# Altium PCB PCB2.PcbDoc (part 1 of 2)
Units mil, origin at the board's own origin, x right, y up, seen from the top; angles counter-clockwise.
Board outline 322 x 552 mil, 6 copper layers (Top Layer, Layer 2, Layer 3, Layer 4, Layer 5, Bottom Layer), stack 16.56 mil thick; 59 components, 50 nets, 249 pads, 145 vias.
Unrouted connection lines stored in the file: 1.
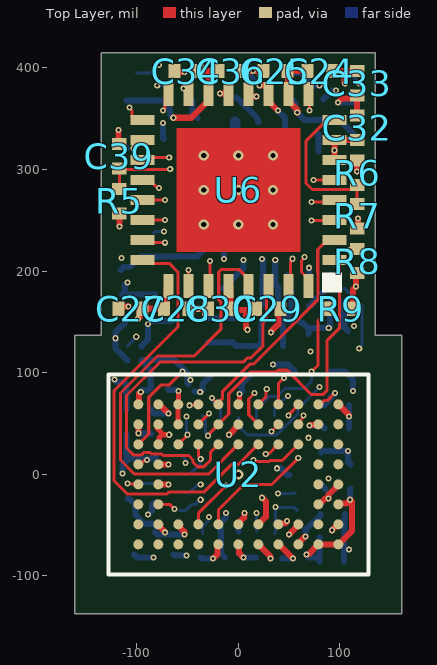
[diagram p0: Top Layer view]
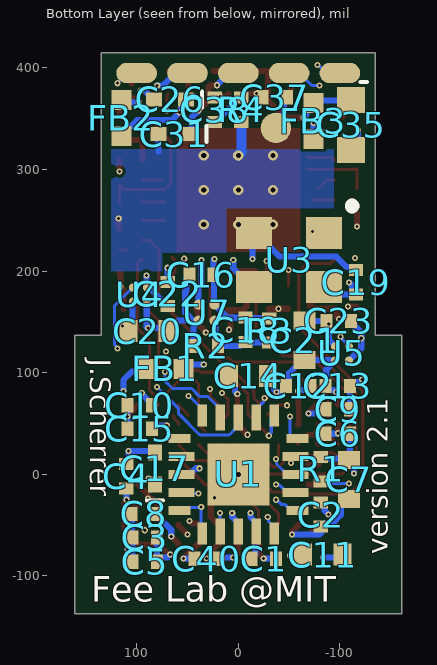
[diagram p1: Bottom Layer view, seen from below]
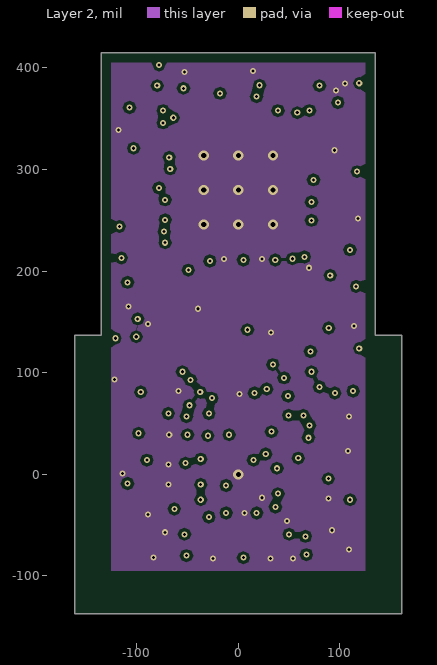
[diagram p2: Layer 2]
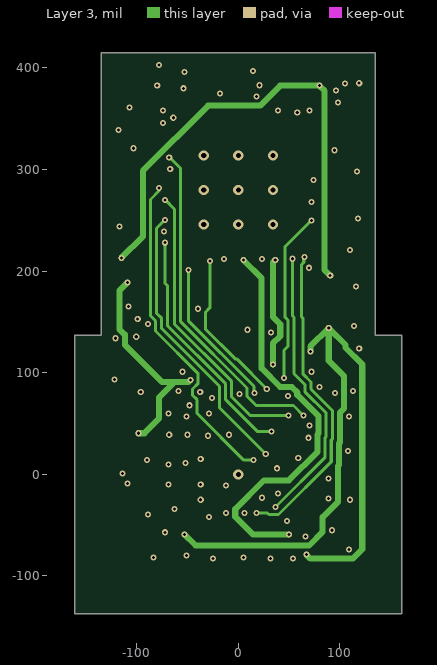
[diagram p3: Layer 3]
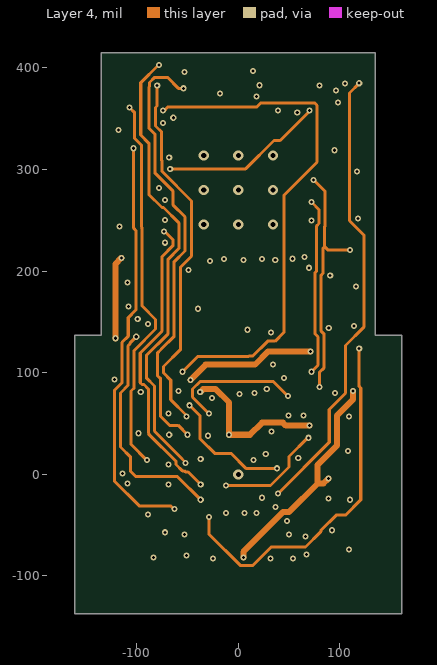
[diagram p4: Layer 4]
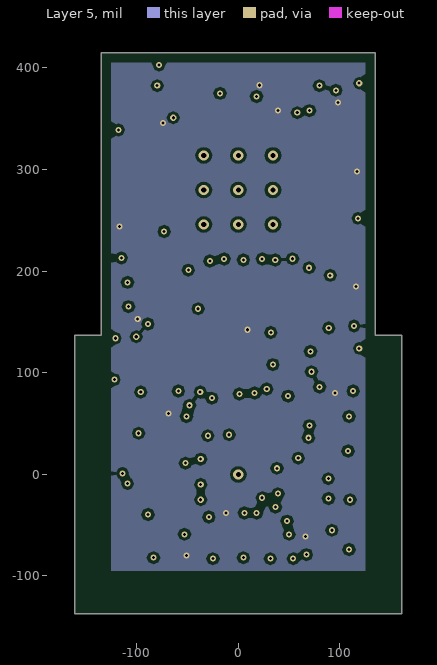
[diagram p5: Layer 5]

## Layer stack, top to bottom
Top Solder: solder mask 0.7, SM-001, Dk 4
Top Layer: signal copper 1.1
Dielectric 2: prepreg 2.24, PP-006, Dk 4.1
Layer 2: signal copper 0.8
Dielectric 4: prepreg 1.84, PP-006, Dk 4.1
Layer 3: signal copper 0.8
Dielectric 1: core 3, Core-043, Dk 4.3
Layer 4: signal copper 0.8
Dielectric 5: prepreg 1.84, PP-006, Dk 4.1
Layer 5: signal copper 0.8
Dielectric 3: prepreg 2.24, PP-006, Dk 4.1
Bottom Layer: signal copper 1.1
Bottom Solder: solder mask 0.7, SM-001, Dk 4

## Board outline
-161,-137 -161,137 -135,137 -135,415 135,415 135,137 161,137 161,-137

## Design rules (kind name [scope] priority, off if disabled: settings)
AssemblyTestPointUsage AssemblyTestPointUsage_1 [All] p2:
AssemblyTestpoint AssemblyTestpoint_1 [All] p2: testpointundercomponent=TRUE minsize=40 maxsize=100 preferedsize=60 minholesize=0 maxholesize=40 preferedholesize=32 testpointgrid=1 usegrid=TRUE gridtolerance=0.01 allowsidetop=TRUE allowsidebottom=TRUE
Clearance [InNamedPolygon('heatsink gnd pad')] p1: gap=10 ignorepadtopadclearanceinfootprint=FALSE
Clearance Clearance_1 [All] p2: gap=3 ignorepadtopadclearanceinfootprint=FALSE
ComponentClearance ComponentClearance_1 [All] p2: gap=10 collisioncheckmode=3 verticalgap=10 showdistances=FALSE
DiffPairsRouting [All] p1: maxlimit=10 minlimit=10 mostfreqgap=10 toplayer_minwidth=15 toplayer_maxwidth=15 toplayer_prefwidth=15 midlayer1_minwidth=15 midlayer1_maxwidth=15 midlayer1_prefwidth=15 midlayer2_minwidth=15 midlayer2_maxwidth=15 midlayer2_prefwidth=15 midlayer3_minwidth=15 midlayer3_maxwidth=15 midlayer3_prefwidth=15 midlayer4_minwidth=15 midlayer4_maxwidth=15 midlayer4_prefwidth=15 bottomlayer_minwidth=15 bottomlayer_maxwidth=15 bottomlayer_prefwidth=15 substack1={04049C44-5C74-421C-8C8B-6C3446CB44A6} toplayer_{04049c44-5c74-421c-8c8b-6c3446cb44a6}_minwidth=15 toplayer_{04049c44-5c74-421c-8c8b-6c3446cb44a6}_maxwidth=15 toplayer_{04049c44-5c74-421c-8c8b-6c3446cb44a6}_prefwidth=15 midlayer1_{04049c44-5c74-421c-8c8b-6c3446cb44a6}_minwidth=15 midlayer1_{04049c44-5c74-421c-8c8b-6c3446cb44a6}_maxwidth=15 midlayer1_{04049c44-5c74-421c-8c8b-6c3446cb44a6}_prefwidth=15 midlayer2_{04049c44-5c74-421c-8c8b-6c3446cb44a6}_minwidth=15 midlayer2_{04049c44-5c74-421c-8c8b-6c3446cb44a6}_maxwidth=15 midlayer2_{04049c44-5c74-421c-8c8b-6c3446cb44a6}_prefwidth=15 midlayer3_{04049c44-5c74-421c-8c8b-6c3446cb44a6}_minwidth=15 midlayer3_{04049c44-5c74-421c-8c8b-6c3446cb44a6}_maxwidth=15 midlayer3_{04049c44-5c74-421c-8c8b-6c3446cb44a6}_prefwidth=15 midlayer4_{04049c44-5c74-421c-8c8b-6c3446cb44a6}_minwidth=15 midlayer4_{04049c44-5c74-421c-8c8b-6c3446cb44a6}_maxwidth=15 midlayer4_{04049c44-5c74-421c-8c8b-6c3446cb44a6}_prefwidth=15 bottomlayer_{04049c44-5c74-421c-8c8b-6c3446cb44a6}_minwidth=15 bottomlayer_{04049c44-5c74-421c-8c8b-6c3446cb44a6}_maxwidth=15 bottomlayer_{04049c44-5c74-421c-8c8b-6c3446cb44a6}_prefwidth=15 substack2={37908A90-237A-4A3D-9E86-24E43066B293} toplayer_{37908a90-237a-4a3d-9e86-24e43066b293}_minwidth=15 toplayer_{37908a90-237a-4a3d-9e86-24e43066b293}_maxwidth=15 toplayer_{37908a90-237a-4a3d-9e86-24e43066b293}_prefwidth=15 midlayer1_{37908a90-237a-4a3d-9e86-24e43066b293}_minwidth=15 midlayer1_{37908a90-237a-4a3d-9e86-24e43066b293}_maxwidth=15 midlayer1_{37908a90-237a-4a3d-9e86-24e43066b293}_prefwidth=15 midlayer2_{37908a90-237a-4a3d-9e86-24e43066b293}_minwidth=15 midlayer2_{37908a90-237a-4a3d-9e86-24e43066b293}_maxwidth=15 midlayer2_{37908a90-237a-4a3d-9e86-24e43066b293}_prefwidth=15 midlayer3_{37908a90-237a-4a3d-9e86-24e43066b293}_minwidth=15 midlayer3_{37908a90-237a-4a3d-9e86-24e43066b293}_maxwidth=15 midlayer3_{37908a90-237a-4a3d-9e86-24e43066b293}_prefwidth=15 midlayer4_{37908a90-237a-4a3d-9e86-24e43066b293}_minwidth=15 midlayer4_{37908a90-237a-4a3d-9e86-24e43066b293}_maxwidth=15 midlayer4_{37908a90-237a-4a3d-9e86-24e43066b293}_prefwidth=15 bottomlayer_{37908a90-237a-4a3d-9e86-24e43066b293}_minwidth=15 bottomlayer_{37908a90-237a-4a3d-9e86-24e43066b293}_maxwidth=15 bottomlayer_{37908a90-237a-4a3d-9e86-24e43066b293}_prefwidth=15 substack3={8C093600-21DF-4DBC-9B79-6AA3953DC346} toplayer_{8c093600-21df-4dbc-9b79-6aa3953dc346}_minwidth=15 toplayer_{8c093600-21df-4dbc-9b79-6aa3953dc346}_maxwidth=15 toplayer_{8c093600-21df-4dbc-9b79-6aa3953dc346}_prefwidth=15 midlayer1_{8c093600-21df-4dbc-9b79-6aa3953dc346}_minwidth=15 midlayer1_{8c093600-21df-4dbc-9b79-6aa3953dc346}_maxwidth=15 midlayer1_{8c093600-21df-4dbc-9b79-6aa3953dc346}_prefwidth=15 midlayer2_{8c093600-21df-4dbc-9b79-6aa3953dc346}_minwidth=15 midlayer2_{8c093600-21df-4dbc-9b79-6aa3953dc346}_maxwidth=15 midlayer2_{8c093600-21df-4dbc-9b79-6aa3953dc346}_prefwidth=15 midlayer3_{8c093600-21df-4dbc-9b79-6aa3953dc346}_minwidth=15 midlayer3_{8c093600-21df-4dbc-9b79-6aa3953dc346}_maxwidth=15 midlayer3_{8c093600-21df-4dbc-9b79-6aa3953dc346}_prefwidth=15 midlayer4_{8c093600-21df-4dbc-9b79-6aa3953dc346}_minwidth=15 midlayer4_{8c093600-21df-4dbc-9b79-6aa3953dc346}_maxwidth=15 midlayer4_{8c093600-21df-4dbc-9b79-6aa3953dc346}_prefwidth=15 bottomlayer_{8c093600-21df-4dbc-9b79-6aa3953dc346}_minwidth=15 bottomlayer_{8c093600-21df-4dbc-9b79-6aa3953dc346}_maxwidth=15 bottomlayer_{8c093600-21df-4dbc-9b79-6aa3953dc346}_prefwidth=15 substack4={71135496-7A22-4917-991D-F6B3DCE189DD} toplayer_{71135496-7a22-4917-991d-f6b3dce189dd}_minwidth=15 toplayer_{71135496-7a22-4917-991d-f6b3dce189dd}_maxwidth=15 toplayer_{71135496-7a22-4917-991d-f6b3dce189dd}_prefwidth=15 midlayer1_{71135496-7a22-4917-991d-f6b3dce189dd}_minwidth=15 midlayer1_{71135496-7a22-4917-991d-f6b3dce189dd}_maxwidth=15 midlayer1_{71135496-7a22-4917-991d-f6b3dce189dd}_prefwidth=15 midlayer2_{71135496-7a22-4917-991d-f6b3dce189dd}_minwidth=15 midlayer2_{71135496-7a22-4917-991d-f6b3dce189dd}_maxwidth=15 midlayer2_{71135496-7a22-4917-991d-f6b3dce189dd}_prefwidth=15 midlayer3_{71135496-7a22-4917-991d-f6b3dce189dd}_minwidth=15 midlayer3_{71135496-7a22-4917-991d-f6b3dce189dd}_maxwidth=15 midlayer3_{71135496-7a22-4917-991d-f6b3dce189dd}_prefwidth=15 midlayer4_{71135496-7a22-4917-991d-f6b3dce189dd}_minwidth=15 midlayer4_{71135496-7a22-4917-991d-f6b3dce189dd}_maxwidth=15 midlayer4_{71135496-7a22-4917-991d-f6b3dce189dd}_prefwidth=15 bottomlayer_{71135496-7a22-4917-991d-f6b3dce189dd}_minwidth=15 bottomlayer_{71135496-7a22-4917-991d-f6b3dce189dd}_maxwidth=15 bottomlayer_{71135496-7a22-4917-991d-f6b3dce189dd}_prefwidth=15 substack5={1ACD96C7-9BAE-4E88-B278-E85175CF91E2} toplayer_{1acd96c7-9bae-4e88-b278-e85175cf91e2}_minwidth=15 toplayer_{1acd96c7-9bae-4e88-b278-e85175cf91e2}_maxwidth=15 toplayer_{1acd96c7-9bae-4e88-b278-e85175cf91e2}_prefwidth=15 midlayer1_{1acd96c7-9bae-4e88-b278-e85175cf91e2}_minwidth=15 midlayer1_{1acd96c7-9bae-4e88-b278-e85175cf91e2}_maxwidth=15 midlayer1_{1acd96c7-9bae-4e88-b278-e85175cf91e2}_prefwidth=15 midlayer2_{1acd96c7-9bae-4e88-b278-e85175cf91e2}_minwidth=15 midlayer2_{1acd96c7-9bae-4e88-b278-e85175cf91e2}_maxwidth=15 midlayer2_{1acd96c7-9bae-4e88-b278-e85175cf91e2}_prefwidth=15 midlayer3_{1acd96c7-9bae-4e88-b278-e85175cf91e2}_minwidth=15 midlayer3_{1acd96c7-9bae-4e88-b278-e85175cf91e2}_maxwidth=15 midlayer3_{1acd96c7-9bae-4e88-b278-e85175cf91e2}_prefwidth=15 midlayer4_{1acd96c7-9bae-4e88-b278-e85175cf91e2}_minwidth=15 midlayer4_{1acd96c7-9bae-4e88-b278-e85175cf91e2}_maxwidth=15 midlayer4_{1acd96c7-9bae-4e88-b278-e85175cf91e2}_prefwidth=15 bottomlayer_{1acd96c7-9bae-4e88-b278-e85175cf91e2}_minwidth=15 bottomlayer_{1acd96c7-9bae-4e88-b278-e85175cf91e2}_maxwidth=15 bottomlayer_{1acd96c7-9bae-4e88-b278-e85175cf91e2}_prefwidth=15 maxuncoupledlength=500
DiffPairsRouting DiffPairsRouting_1 [All] p2: maxlimit=10 minlimit=10 mostfreqgap=10 toplayer_minwidth=15 toplayer_maxwidth=15 toplayer_prefwidth=15 midlayer1_minwidth=15 midlayer1_maxwidth=15 midlayer1_prefwidth=15 midlayer2_minwidth=15 midlayer2_maxwidth=15 midlayer2_prefwidth=15 midlayer3_minwidth=15 midlayer3_maxwidth=15 midlayer3_prefwidth=15 midlayer4_minwidth=15 midlayer4_maxwidth=15 midlayer4_prefwidth=15 bottomlayer_minwidth=15 bottomlayer_maxwidth=15 bottomlayer_prefwidth=15 substack1={04049C44-5C74-421C-8C8B-6C3446CB44A6} toplayer_{04049c44-5c74-421c-8c8b-6c3446cb44a6}_minwidth=15 toplayer_{04049c44-5c74-421c-8c8b-6c3446cb44a6}_maxwidth=15 toplayer_{04049c44-5c74-421c-8c8b-6c3446cb44a6}_prefwidth=15 midlayer1_{04049c44-5c74-421c-8c8b-6c3446cb44a6}_minwidth=15 midlayer1_{04049c44-5c74-421c-8c8b-6c3446cb44a6}_maxwidth=15 midlayer1_{04049c44-5c74-421c-8c8b-6c3446cb44a6}_prefwidth=15 midlayer2_{04049c44-5c74-421c-8c8b-6c3446cb44a6}_minwidth=15 midlayer2_{04049c44-5c74-421c-8c8b-6c3446cb44a6}_maxwidth=15 midlayer2_{04049c44-5c74-421c-8c8b-6c3446cb44a6}_prefwidth=15 midlayer3_{04049c44-5c74-421c-8c8b-6c3446cb44a6}_minwidth=15 midlayer3_{04049c44-5c74-421c-8c8b-6c3446cb44a6}_maxwidth=15 midlayer3_{04049c44-5c74-421c-8c8b-6c3446cb44a6}_prefwidth=15 midlayer4_{04049c44-5c74-421c-8c8b-6c3446cb44a6}_minwidth=15 midlayer4_{04049c44-5c74-421c-8c8b-6c3446cb44a6}_maxwidth=15 midlayer4_{04049c44-5c74-421c-8c8b-6c3446cb44a6}_prefwidth=15 bottomlayer_{04049c44-5c74-421c-8c8b-6c3446cb44a6}_minwidth=15 bottomlayer_{04049c44-5c74-421c-8c8b-6c3446cb44a6}_maxwidth=15 bottomlayer_{04049c44-5c74-421c-8c8b-6c3446cb44a6}_prefwidth=15 substack2={37908A90-237A-4A3D-9E86-24E43066B293} toplayer_{37908a90-237a-4a3d-9e86-24e43066b293}_minwidth=15 toplayer_{37908a90-237a-4a3d-9e86-24e43066b293}_maxwidth=15 toplayer_{37908a90-237a-4a3d-9e86-24e43066b293}_prefwidth=15 midlayer1_{37908a90-237a-4a3d-9e86-24e43066b293}_minwidth=15 midlayer1_{37908a90-237a-4a3d-9e86-24e43066b293}_maxwidth=15 midlayer1_{37908a90-237a-4a3d-9e86-24e43066b293}_prefwidth=15 midlayer2_{37908a90-237a-4a3d-9e86-24e43066b293}_minwidth=15 midlayer2_{37908a90-237a-4a3d-9e86-24e43066b293}_maxwidth=15 midlayer2_{37908a90-237a-4a3d-9e86-24e43066b293}_prefwidth=15 midlayer3_{37908a90-237a-4a3d-9e86-24e43066b293}_minwidth=15 midlayer3_{37908a90-237a-4a3d-9e86-24e43066b293}_maxwidth=15 midlayer3_{37908a90-237a-4a3d-9e86-24e43066b293}_prefwidth=15 midlayer4_{37908a90-237a-4a3d-9e86-24e43066b293}_minwidth=15 midlayer4_{37908a90-237a-4a3d-9e86-24e43066b293}_maxwidth=15 midlayer4_{37908a90-237a-4a3d-9e86-24e43066b293}_prefwidth=15 bottomlayer_{37908a90-237a-4a3d-9e86-24e43066b293}_minwidth=15 bottomlayer_{37908a90-237a-4a3d-9e86-24e43066b293}_maxwidth=15 bottomlayer_{37908a90-237a-4a3d-9e86-24e43066b293}_prefwidth=15 substack3={8C093600-21DF-4DBC-9B79-6AA3953DC346} toplayer_{8c093600-21df-4dbc-9b79-6aa3953dc346}_minwidth=15 toplayer_{8c093600-21df-4dbc-9b79-6aa3953dc346}_maxwidth=15 toplayer_{8c093600-21df-4dbc-9b79-6aa3953dc346}_prefwidth=15 midlayer1_{8c093600-21df-4dbc-9b79-6aa3953dc346}_minwidth=15 midlayer1_{8c093600-21df-4dbc-9b79-6aa3953dc346}_maxwidth=15 midlayer1_{8c093600-21df-4dbc-9b79-6aa3953dc346}_prefwidth=15 midlayer2_{8c093600-21df-4dbc-9b79-6aa3953dc346}_minwidth=15 midlayer2_{8c093600-21df-4dbc-9b79-6aa3953dc346}_maxwidth=15 midlayer2_{8c093600-21df-4dbc-9b79-6aa3953dc346}_prefwidth=15 midlayer3_{8c093600-21df-4dbc-9b79-6aa3953dc346}_minwidth=15 midlayer3_{8c093600-21df-4dbc-9b79-6aa3953dc346}_maxwidth=15 midlayer3_{8c093600-21df-4dbc-9b79-6aa3953dc346}_prefwidth=15 midlayer4_{8c093600-21df-4dbc-9b79-6aa3953dc346}_minwidth=15 midlayer4_{8c093600-21df-4dbc-9b79-6aa3953dc346}_maxwidth=15 midlayer4_{8c093600-21df-4dbc-9b79-6aa3953dc346}_prefwidth=15 bottomlayer_{8c093600-21df-4dbc-9b79-6aa3953dc346}_minwidth=15 bottomlayer_{8c093600-21df-4dbc-9b79-6aa3953dc346}_maxwidth=15 bottomlayer_{8c093600-21df-4dbc-9b79-6aa3953dc346}_prefwidth=15 substack4={71135496-7A22-4917-991D-F6B3DCE189DD} toplayer_{71135496-7a22-4917-991d-f6b3dce189dd}_minwidth=15 toplayer_{71135496-7a22-4917-991d-f6b3dce189dd}_maxwidth=15 toplayer_{71135496-7a22-4917-991d-f6b3dce189dd}_prefwidth=15 midlayer1_{71135496-7a22-4917-991d-f6b3dce189dd}_minwidth=15 midlayer1_{71135496-7a22-4917-991d-f6b3dce189dd}_maxwidth=15 midlayer1_{71135496-7a22-4917-991d-f6b3dce189dd}_prefwidth=15 midlayer2_{71135496-7a22-4917-991d-f6b3dce189dd}_minwidth=15 midlayer2_{71135496-7a22-4917-991d-f6b3dce189dd}_maxwidth=15 midlayer2_{71135496-7a22-4917-991d-f6b3dce189dd}_prefwidth=15 midlayer3_{71135496-7a22-4917-991d-f6b3dce189dd}_minwidth=15 midlayer3_{71135496-7a22-4917-991d-f6b3dce189dd}_maxwidth=15 midlayer3_{71135496-7a22-4917-991d-f6b3dce189dd}_prefwidth=15 midlayer4_{71135496-7a22-4917-991d-f6b3dce189dd}_minwidth=15 midlayer4_{71135496-7a22-4917-991d-f6b3dce189dd}_maxwidth=15 midlayer4_{71135496-7a22-4917-991d-f6b3dce189dd}_prefwidth=15 bottomlayer_{71135496-7a22-4917-991d-f6b3dce189dd}_minwidth=15 bottomlayer_{71135496-7a22-4917-991d-f6b3dce189dd}_maxwidth=15 bottomlayer_{71135496-7a22-4917-991d-f6b3dce189dd}_prefwidth=15 substack5={1ACD96C7-9BAE-4E88-B278-E85175CF91E2} toplayer_{1acd96c7-9bae-4e88-b278-e85175cf91e2}_minwidth=15 toplayer_{1acd96c7-9bae-4e88-b278-e85175cf91e2}_maxwidth=15 toplayer_{1acd96c7-9bae-4e88-b278-e85175cf91e2}_prefwidth=15 midlayer1_{1acd96c7-9bae-4e88-b278-e85175cf91e2}_minwidth=15 midlayer1_{1acd96c7-9bae-4e88-b278-e85175cf91e2}_maxwidth=15 midlayer1_{1acd96c7-9bae-4e88-b278-e85175cf91e2}_prefwidth=15 midlayer2_{1acd96c7-9bae-4e88-b278-e85175cf91e2}_minwidth=15 midlayer2_{1acd96c7-9bae-4e88-b278-e85175cf91e2}_maxwidth=15 midlayer2_{1acd96c7-9bae-4e88-b278-e85175cf91e2}_prefwidth=15 midlayer3_{1acd96c7-9bae-4e88-b278-e85175cf91e2}_minwidth=15 midlayer3_{1acd96c7-9bae-4e88-b278-e85175cf91e2}_maxwidth=15 midlayer3_{1acd96c7-9bae-4e88-b278-e85175cf91e2}_prefwidth=15 midlayer4_{1acd96c7-9bae-4e88-b278-e85175cf91e2}_minwidth=15 midlayer4_{1acd96c7-9bae-4e88-b278-e85175cf91e2}_maxwidth=15 midlayer4_{1acd96c7-9bae-4e88-b278-e85175cf91e2}_prefwidth=15 bottomlayer_{1acd96c7-9bae-4e88-b278-e85175cf91e2}_minwidth=15 bottomlayer_{1acd96c7-9bae-4e88-b278-e85175cf91e2}_maxwidth=15 bottomlayer_{1acd96c7-9bae-4e88-b278-e85175cf91e2}_prefwidth=15 maxuncoupledlength=500
FabricationTestPointUsage FabricationTestPointUsage_1 [All] p2: valid=0 allowmultiple=FALSE
FabricationTestpoint FabricationTestpoint_1 [All] p2: side=3 testpointundercomponent=TRUE minsize=40 maxsize=100 preferedsize=60 minholesize=0 maxholesize=40 preferedholesize=32 testpointgrid=1 allowsidetop=TRUE allowsidebottom=TRUE usegrid=TRUE gridtolerance=0.01
FanoutControl Fanout_LCC [IsLCC] p1: bgadir=Out bgaviamode=Centered fanoutstyle=Auto fanoutdirection=Alternating viagrid=1 // Fanout_LCC (Default Rule)
FanoutControl Fanout_BGA [IsBGA] p2: bgadir=Out bgaviamode=Centered fanoutstyle=Auto fanoutdirection=Alternating viagrid=1 // Fanout_BGA (Default Rule)
FanoutControl Fanout_Small [(CompPinCount < 5)] p3: bgadir=Out bgaviamode=Centered fanoutstyle=Auto fanoutdirection=OutThenIn viagrid=1 // Fanout_Small (Default Rule)
FanoutControl Fanout_SOIC [IsSOIC] p4: bgadir=Out bgaviamode=Centered fanoutstyle=Auto fanoutdirection=Alternating viagrid=1 // Fanout_SOIC (Default Rule)
FanoutControl Fanout_BGA_1 [IsBGA] p6: bgadir=Out bgaviamode=Centered fanoutstyle=Auto fanoutdirection=Alternating viagrid=1 // Fanout_BGA (Default Rule)
FanoutControl Fanout_LCC_1 [IsLCC] p7: bgadir=Out bgaviamode=Centered fanoutstyle=Auto fanoutdirection=Alternating viagrid=1 // Fanout_LCC (Default Rule)
FanoutControl Fanout_SOIC_1 [IsSOIC] p8: bgadir=Out bgaviamode=Centered fanoutstyle=Auto fanoutdirection=Alternating viagrid=1 // Fanout_SOIC (Default Rule)
FanoutControl Fanout_Small_1 [(CompPinCount < 5)] p9: bgadir=Out bgaviamode=Centered fanoutstyle=Auto fanoutdirection=OutThenIn viagrid=1 // Fanout_Small (Default Rule)
FanoutControl Fanout_Default_1 [All] p10: bgadir=Out bgaviamode=Centered fanoutstyle=Auto fanoutdirection=Alternating viagrid=1 // Fanout_Default (Default Rule)
Height Height_1 [All] p2: minheight=0 maxheight=1000 prefheight=500
HoleSize HoleSize_1 [All] p2: absolutevalues=TRUE maxlimit=100 minlimit=1 maxpercent=80.000 minpercent=20.000
HoleToHoleClearance [All] p1: gap=8 allowstackedmicrovias=TRUE
LayerPairs LayerPairs_1 [All] p2: enforce=TRUE
MinimumSolderMaskSliver [All] p1: minsoldermaskwidth=0
NetAntennae NetAntennae_1 [All] p2: netantennaetolerance=0
PasteMaskExpansion PasteMaskExpansion_1 [All] p2: expansion=0
PlaneClearance PlaneClearance_1 [All] p2: clearance=20
PlaneConnect PlaneConnect_1 [All] p2: planeconnectstyle=Relief reliefexpansion=20 reliefentries=4 reliefconductorwidth=10 reliefairgap=10
PolygonConnect PolygonConnect_11 [All vs IsNamedPolygon('GND')] p1: connectstyle=Direct reliefconductorwidth=10 reliefentries=4 polygonreliefangle="90 Angle" airgapwidth=10
PolygonConnect PolygonConnect_10 [All vs IsNamedPolygon('heatsink gnd pad')] p2: connectstyle=Direct reliefconductorwidth=10 reliefentries=4 polygonreliefangle="90 Angle" airgapwidth=10
PolygonConnect PolygonConnect_9 [All vs IsNamedPolygon('heatsink gnd pad')] p3: connectstyle=Direct reliefconductorwidth=10 reliefentries=4 polygonreliefangle="90 Angle" airgapwidth=10
PolygonConnect PolygonConnect_8 [All vs IsNamedPolygon('heatsink gnd pad')] p4: thpad.connectstyle=Direct thpad.reliefconductorwidth=10 thpad.reliefentries=4 thpad.polygonreliefangle="90 Angle" thpad.airgapwidth=10 smdpad.connectstyle=Relief smdpad.reliefconductorwidth=10 smdpad.reliefentries=4 smdpad.polygonreliefangle="90 Angle" smdpad.airgapwidth=10 via.connectstyle=Relief via.reliefconductorwidth=10 via.reliefentries=4 via.polygonreliefangle="90 Angle" via.airgapwidth=10
PolygonConnect "direct connect" [All vs IsNamedPolygon('Layer 2-V1P8') Or  IsNamedPolygon('Layer 1-GND')] p5: connectstyle=Direct reliefconductorwidth=10 reliefentries=4 polygonreliefangle="90 Angle" airgapwidth=10
PolygonConnect PolygonConnect_7 [All vs IsNamedPolygon('Layer 2-V1P8')] p6: connectstyle=Relief reliefconductorwidth=5 reliefentries=4 polygonreliefangle="90 Angle" airgapwidth=5
PolygonConnect PolygonConnect_6 [All vs IsNamedPolygon('Layer 2-V1P8')] p7: thpad.connectstyle=Relief thpad.reliefconductorwidth=5 thpad.reliefentries=4 thpad.polygonreliefangle="90 Angle" thpad.airgapwidth=5 smdpad.connectstyle=Relief smdpad.reliefconductorwidth=10 smdpad.reliefentries=4 smdpad.polygonreliefangle="90 Angle" smdpad.airgapwidth=10 via.connectstyle=Relief via.reliefconductorwidth=10 via.reliefentries=4 via.polygonreliefangle="90 Angle" via.airgapwidth=10
PolygonConnect PolygonConnect_5 [All vs IsNamedPolygon('Layer 2-V1P8')] p8: thpad.connectstyle=Relief thpad.reliefconductorwidth=5 thpad.reliefentries=4 thpad.polygonreliefangle="90 Angle" thpad.airgapwidth=5 smdpad.connectstyle=Relief smdpad.reliefconductorwidth=10 smdpad.reliefentries=4 smdpad.polygonreliefangle="90 Angle" smdpad.airgapwidth=10 via.connectstyle=Relief via.reliefconductorwidth=10 via.reliefentries=4 via.polygonreliefangle="90 Angle" via.airgapwidth=10
PolygonConnect PolygonConnect_4 [All vs IsNamedPolygon('Layer 2-V1P8')] p9: thpad.connectstyle=Relief thpad.reliefconductorwidth=5 thpad.reliefentries=4 thpad.polygonreliefangle="90 Angle" thpad.airgapwidth=5 smdpad.connectstyle=Relief smdpad.reliefconductorwidth=10 smdpad.reliefentries=4 smdpad.polygonreliefangle="90 Angle" smdpad.airgapwidth=10 via.connectstyle=Relief via.reliefconductorwidth=10 via.reliefentries=4 via.polygonreliefangle="90 Angle" via.airgapwidth=10
PolygonConnect PolygonConnect_3 [All vs IsNamedPolygon('Layer 2-V1P8')] p10: thpad.connectstyle=Relief thpad.reliefconductorwidth=5 thpad.reliefentries=4 thpad.polygonreliefangle="90 Angle" thpad.airgapwidth=5 smdpad.connectstyle=Relief smdpad.reliefconductorwidth=10 smdpad.reliefentries=4 smdpad.polygonreliefangle="90 Angle" smdpad.airgapwidth=10 via.connectstyle=Relief via.reliefconductorwidth=10 via.reliefentries=4 via.polygonreliefangle="90 Angle" via.airgapwidth=10
PolygonConnect PolygonConnect_2 [All vs IsNamedPolygon('Layer 1-GND')] p11: connectstyle=Relief reliefconductorwidth=5 reliefentries=4 polygonreliefangle="90 Angle" airgapwidth=5
PolygonConnect [All] p12: connectstyle=Relief reliefconductorwidth=10 reliefentries=4 polygonreliefangle="90 Angle" airgapwidth=10
PolygonConnect PolygonConnect_1 [All] p13: connectstyle=Relief reliefconductorwidth=10 reliefentries=4 polygonreliefangle="90 Angle" airgapwidth=10
RoutingCorners RoutingCorners_1 [All] p2: cornerstyle=45-Degree minsetback=100 maxsetback=100
RoutingLayers RoutingLayers_1 [All] p2: top layer_v5=TRUE mid layer 1_v5=TRUE mid layer 2_v5=TRUE mid layer 3_v5=TRUE mid layer 4_v5=TRUE bottom layer_v5=TRUE
RoutingPriority RoutingPriority_1 [All] p2: routingpriority=0
RoutingTopology RoutingTopology_1 [All] p2: topology=Shortest
RoutingVias RoutingVias_1 [All] p1: holewidth=3 width=6 viastyle="Through Hole" minholewidth=3 minwidth=6 maxholewidth=28 maxwidth=50 useviatemplates=TRUE viatemplateguid#1={D6095014-525C-4792-8558-6859CBED3188} viatemplateguid#2={84345D4C-6583-4E94-BA29-D49304F99088} viatemplatename#1=v15h8m0mx0 viatemplatename#2=v15h8m0
ShortCircuit ShortCircuit_1 [All] p2: allowed=FALSE
SilkToBoardRegionClearance SilkToBoardRegionClearance_1 [All] p2:
SilkToSilkClearance [All] p1: silktosilkclearance=0
SilkToSolderMaskClearance [IsPad] p1: minsilkscreentomaskgap=0 clearancetoexposedcopper=TRUE
SolderMaskExpansion [All] p1: expansion=1.97 istentingtop=FALSE
UnRoutedNet UnRoutedNet_1 [All] p2:
UnpouredPolygon UnpouredPolygon_1 [All] p2:
Width Width_1 [All] p1: maxlimit=10 minlimit=3 preferedwidth=3 substack1={04049C44-5C74-421C-8C8B-6C3446CB44A6} substack2={37908A90-237A-4A3D-9E86-24E43066B293} substack3={8C093600-21DF-4DBC-9B79-6AA3953DC346} substack4={71135496-7A22-4917-991D-F6B3DCE189DD} substack5={1ACD96C7-9BAE-4E88-B278-E85175CF91E2}
21 further rules are at their usual default settings.

## Classes and differential pairs
component class U_I2C-to-SPI: C1 U1
component class U_Image_Sensor: C2 C3 C4 C5 C6 C7 C8 C9 C10 C11 C12 C13 C14 C15 C40 R1 U2
component class U_Python_Auxiliary: C16 C17 C18 C19 C20 C21 C22 C23 FB1 R2 R3 U3 U4 U5 U7
component class U_Serializer: C24 C25 C26 C27 C28 C29 C30 C31 C32 C33 C34 C35 C36 C37 C38 C39 FB2 FB3 R4 R5 R6 R7 R8 R9 U6
net class DATA[0..9]: DATA0 DATA1 DATA2 DATA3 DATA4 DATA5 DATA6 DATA7 DATA8 DATA9

## Components (designator, comment, footprint, x,y, rotation, side; value= is the part's Value field where it differs from the comment)
C1 "GRM033C71C104KE14D" PCB-v6eq6etc9p7u7qdkgnno-1 -25,-83 r0 bottom
C2 "GRM033C71C104KE14D" PCB-v6eq6etc9p7u7qdkgnno-1 -81,-39.5 r270 bottom
C3 "GRM033C71C104KE14D" PCB-v6eq6etc9p7u7qdkgnno-1 92,-62.1 r180 bottom
C4 "GRM033C71C104KE14D" PCB-v6eq6etc9p7u7qdkgnno-1 110.4,-2 r270 bottom
C5 "GRM033C71C104KE14D" PCB-v6eq6etc9p7u7qdkgnno-1 92,-85.87 r180 bottom
C6 "GRM033C71C104KE14D" PCB-v6eq6etc9p7u7qdkgnno-1 -98,40 r0 bottom
C7 "GRM155R61A106ME11D" PCB-uspfzztrpe7hn2xlyjz9-1 -108.89,-5 r90 bottom
C8 "GRM033R71A103KA01D" PCB-v6eq6etc9p7u7qdkgnno-1 93,-39 r180 bottom
C9 "GRM033C71C104KE14D" PCB-v6eq6etc9p7u7qdkgnno-1 -98,64 r0 bottom
C10 "GRM033C71C104KE14D" PCB-v6eq6etc9p7u7qdkgnno-1 97,68 r180 bottom
C11 "GRM155R61A106ME11D" PCB-uspfzztrpe7hn2xlyjz9-1 -83.09,-79 r180 bottom
C12 "GRM033C71C104KE14D" PCB-v6eq6etc9p7u7qdkgnno-1 -59,87 r0 bottom
C13 "GRM033C71C104KE14D" PCB-v6eq6etc9p7u7qdkgnno-1 -98,87 r0 bottom
C14 "GRM155R61A106ME11D" PCB-uspfzztrpe7hn2xlyjz9-1 -10,97 r0 bottom
C15 "GRM033R71A103KA01D" PCB-v6eq6etc9p7u7qdkgnno-1 97,45 r180 bottom
C16 "GRM033C71C104KE14D" PCB-v6eq6etc9p7u7qdkgnno-1 36.25,196.4 r0 bottom
C17 "F981A475MUALZT" PCB-t0dwbiosd2m6unyihqym-1 82,6 r90 bottom
C18 "GRM033C71C104KE14D" PCB-v6eq6etc9p7u7qdkgnno-1 -7.09,142.18 r270 bottom
C19 "GRM033R71A103KA01D" PCB-v6eq6etc9p7u7qdkgnno-1 -115.85,189 r270 bottom
C20 "GRM155R61A106ME11D" PCB-uspfzztrpe7hn2xlyjz9-1 89,141 r0 bottom
C21 "GRM155R61A106ME11D" PCB-uspfzztrpe7hn2xlyjz9-1 -65,132 r90 bottom
C22 "GRM033R60J105MEA2D" PCB-v6eq6etc9p7u7qdkgnno-1 69.49,177.57 r270 bottom
C23 "GRM033R60J105MEA2D" PCB-v6eq6etc9p7u7qdkgnno-1 -99,151 r180 bottom
C24 "GRM033C71C104KE14D" PCB-v6eq6etc9p7u7qdkgnno-1 80.05,397 r180 top
C25 "GRM033R71A103KA01D" PCB-v6eq6etc9p7u7qdkgnno-1 36.58,397 r0 top
C26 "F981A475MUALZT" PCB-t0dwbiosd2m6unyihqym-1 67,369 r0 bottom
C27 "GRM033R71A103KA01D" PCB-v6eq6etc9p7u7qdkgnno-1 -106.11,163 r0 top
C28 "GRM033C71C104KE14D" PCB-v6eq6etc9p7u7qdkgnno-1 -61.02,163 r180 top
C29 "GRM033R71A103KA01D" PCB-v6eq6etc9p7u7qdkgnno-1 29.53,163 r180 top
C30 "GRM033C71C104KE14D" PCB-v6eq6etc9p7u7qdkgnno-1 -18,163 r0 top
C31 "F981A475MUALZT" PCB-t0dwbiosd2m6unyihqym-1 63,335 r0 bottom
C32 "GRM033C71C104KE14D" PCB-v6eq6etc9p7u7qdkgnno-1 117,341 r90 top
C33 "GRM033R71A103KA01D" PCB-v6eq6etc9p7u7qdkgnno-1 117,385 r270 top
C34 "GRM033R71A103KA01D" PCB-v6eq6etc9p7u7qdkgnno-1 -51,397 r0 top
C35 "F981A226MMALZT" PCB-yxd74t6run51sg1ha7ug-1 -110.97,344.01 r270 bottom
C36 "GRM033C71C104KE14D" PCB-v6eq6etc9p7u7qdkgnno-1 -7.58,397 r180 top
C37 "GRM033C71C104KE14D" PCB-v6eq6etc9p7u7qdkgnno-1 -36,371 r0 bottom
C38 "GRM033R60J473KE19D" PCB-v6eq6etc9p7u7qdkgnno-1 23,359 r270 bottom
C39 "GRM033R60J105MEA2D" PCB-v6eq6etc9p7u7qdkgnno-1 -117,313 r270 top
C40 "GRM033C71C104KE14D" PCB-v6eq6etc9p7u7qdkgnno-1 31,-83 r0 bottom
FB1 "BLM15AX601SN1D" MURA-BLM15-CHIP-2_V 71.9,103.79 r0 bottom
FB2 "BLM15AX102SN1D" MURA-BLM15-CHIP-2_V 115,351 r90 bottom
FB3 "BLM15AX102SN1D" MURA-BLM15-CHIP-2_V -74,348 r270 bottom
R1 "ERJ-1GNF4702C" PCB-7g93mzch2qc2q3jid3ok-1 -81,5 r270 bottom
R2 "ERA-1AEB152C" PCB-7g93mzch2qc2q3jid3ok-1 32.15,126.38 r0 bottom
R3 "CRCW02011K80JNED" PCB-7g93mzch2qc2q3jid3ok-1 -30.52,141.58 r270 bottom
R4 "TNPW020149R9BEED" PCB-7g93mzch2qc2q3jid3ok-1 -3,359 r270 bottom
R5 "ERJ-1GNF1002C" PCB-7g93mzch2qc2q3jid3ok-1 -117,269 r270 top
R6 "ERJ-1GNF1002C" PCB-7g93mzch2qc2q3jid3ok-1 117,297 r90 top
R7 "ERJ-1GNF1003C" PCB-7g93mzch2qc2q3jid3ok-1 117,254 r270 top
R8 "ERJ-1GNF3301C" PCB-7g93mzch2qc2q3jid3ok-1 117,210 r270 top
R9 "ERJ-1GNF3301C" PCB-7g93mzch2qc2q3jid3ok-1 101,163 r0 top
U1 "ATTINY816-MFR" PCB-hv4cq49t2e9uf1npj5by-1 0,0 r90 bottom
U2 "Python 480" "Python 480" 0,0 r0 top
U3 "KC2520Z66.6667C1KX00" ASD -50,211 r180 bottom
U4 "NCP163AFCT330T2G" PCB-ng8273kv6qqz2xsov2q1-1 97,177 r270 bottom
U5 "NCP163AFCT330T2G" PCB-ng8273kv6qqz2xsov2q1-1 -102,119 r0 bottom
U6 "DS90UB913ATRTVRQ1" PCB-l2nnig1h4ckv44w98gav-1 0,280 r90 top
U7 "MAX44281OANS+T" FP-N40A0-1-MFG 31.3,159.17 r0 bottom

## Footprints (in the part's own frame and the unit in brackets; to place one, negate y for a bottom-side part, rotate by r counter-clockwise, add the part's x,y. Pads: shape width x height; smd on the part's side, far side on the other; paste and mask are expansions set on the pad)
ASD [mm]
  rect 0.9x0.8 smd: 1(0.875,0.675) 2(-0.875,0.675) 3(-0.875,-0.675) 4(0.875,-0.675)
  silkscreen extent 1.52,1.29 1.63,1.41, body extent -1.25,-1 1.25,1, height 0.25
FP-N40A0-1-MFG [mm]
  round 0.25 smd: A1(-0.2,0.2) A2(0.2,0.2) B1(-0.2,-0.2)
  round 0.25 smd paste+0: B2(0.2,-0.2)
  body extent -0.42,-0.42 0.42,0.42, height 0.55
MURA-BLM15-CHIP-2_V [mm] "Chip Ferrite Bead, 2-Leads, Body 1x0.5mm, Height 0.55mm, Reflow, 1.5A max Rated Current"
  rect 0.5x0.5 smd: 1(-0.45,0) 2(0.45,0)
  body extent -0.5,-0.25 0.5,0.25, height 0.55
PCB-7g93mzch2qc2q3jid3ok-1 [mm]
  rect 0.3x0.36 smd mask+0.05: 1(-0.305,0) 2(0.305,0)
  body extent -0.31,-0.17 0.32,0.17, height 0.33
PCB-hv4cq49t2e9uf1npj5by-1 [mm] "QFN, 20-Leads, Body 5x5mm, Pitch 0.65mm, Thermal Pad 3.15x3.15mm"
  rect 0.55x0.23 smd mask+0.05: 1(-1.475,0.9) 5(-1.475,-0.9) 11(1.475,-0.9) 15(1.475,0.9)
  rect 0.65x0.23 smd mask+0.05: 2(-1.425,0.45) 3(-1.425,0) 4(-1.425,-0.45) 12(1.425,-0.45) 13(1.425,0) 14(1.425,0.45)
  rect 0.23x0.55 smd mask+0.05: 6(-0.9,-1.475) 10(0.9,-1.475) 16(0.9,1.475) 20(-0.9,1.475)
  rect 0.23x0.65 smd mask+0.05: 7(-0.45,-1.425) 8(0,-1.425) 9(0.45,-1.425) 17(0.45,1.425) 18(0,1.425) 19(-0.45,1.425)
  rect 1.55x1.55 smd mask+0.05: 21(0,0)
  body extent -1.49,-1.5 1.5,1.5, height 1
PCB-l2nnig1h4ckv44w98gav-1 [mm]
  rect 0.25x0.6 smd paste-0.1 mask+0.05: 1(-1.75,-2.4) 2(-1.25,-2.4) 3(-0.75,-2.4) 4(-0.25,-2.4) 5(0.25,-2.4) 6(0.75,-2.4) 7(1.25,-2.4) 8(1.75,-2.4) 17(1.75,2.4) 18(1.25,2.4) 19(0.75,2.4) 20(0.25,2.4) 21(-0.25,2.4) 22(-0.75,2.4) 23(-1.25,2.4) 24(-1.75,2.4)
  rect 0.6x0.25 smd paste-0.1 mask+0.05: 9(2.4,-1.75) 10(2.4,-1.25) 11(2.4,-0.75) 12(2.4,-0.25) 13(2.4,0.25) 14(2.4,0.75) 15(2.4,1.25) 16(2.4,1.75) 25(-2.4,1.75) 26(-2.4,1.25) 27(-2.4,0.75) 28(-2.4,0.25) 29(-2.4,-0.25) 30(-2.4,-0.75) 31(-2.4,-1.25) 32(-2.4,-1.75)
  Top Layer region: -1.55,-1.55 1.55,-1.55 1.55,1.55 -1.55,1.55
  body extent -2.5,-2.5 2.5,2.5, height 0.8
PCB-ng8273kv6qqz2xsov2q1-1 [mm]
  round 0.2 smd mask+0.05: A1(-0.175,0.175) A2(0.175,0.175) B1(-0.175,-0.175) B2(0.175,-0.175)
PCB-t0dwbiosd2m6unyihqym-1 [mm]
  rect 0.4x0.35 smd: 1(-0.4,0) 2(0.4,0)
  silkscreen extent -0.8,-0.2 -0.8,0.2, body extent -0.55,-0.3 0.55,0.3, height 0.55
PCB-uspfzztrpe7hn2xlyjz9-1 [mm]
  rect 0.45x0.55 smd mask+0.05: 1(-0.49,0) 2(0.49,0)
  body extent -0.53,-0.28 0.53,0.28, height 0.55
PCB-v6eq6etc9p7u7qdkgnno-1 [mm]
  rect 0.3x0.36 smd mask+0.05: 1(-0.305,0) 2(0.305,0)
  body extent -0.31,-0.17 0.32,0.17, height 0.33
PCB-yxd74t6run51sg1ha7ug-1 [mm]
  rect 0.65x0.7 smd: 1(-0.625,0) 2(0.625,0)
  silkscreen extent -1.07,0.23 -1.07,0.4, body extent -0.8,-0.43 0.8,0.43, height 0.8
"Python 480" [mm] "image sensor"
  round 0.25 smd mask+0.05: A1(-2.5,1.75) A2(-2,1.75) A3(-1.5,1.75) A4(-1,1.75) A5(-0.5,1.75) A6(0,1.75) A7(0.5,1.75) A8(1,1.75) A9(1.5,1.75) A10(2,1.75) A11(2.5,1.75) B1(-2.5,1.25) B2(-2,1.25) B3(-1.5,1.25) B4(-1,1.25) B5(-0.5,1.25) B6(0,1.25) B7(0.5,1.25) B8(1,1.25) B9(1.5,1.25) B10(2,1.25) B11(2.5,1.25) C1(-2.5,0.75) C2(-2,0.75) C3(-1.5,0.75) C4(-1,0.75) C5(-0.5,0.75) C6(0,0.75) C7(0.5,0.75) C8(1,0.75) C9(1.5,0.75) C10(2,0.75) C11(2.5,0.75) D1(-2.5,0.25) D2(-2,0.25) D10(2,0.25) D11(2.5,0.25) E1(-2.5,-0.25) E2(-2,-0.25) E10(2,-0.25) E11(2.5,-0.25) F1(-2.5,-0.75) F2(-2,-0.75) F10(2,-0.75) F11(2.5,-0.75) G1(-2.5,-1.25) G2(-2,-1.25) G3(-1.5,-1.25) G4(-1,-1.25) G5(-0.5,-1.25) G6(0,-1.25) G7(0.5,-1.25) G8(1,-1.25) G9(1.5,-1.25) G10(2,-1.25) G11(2.5,-1.25) H1(-2.5,-1.75) H2(-2,-1.75) H3(-1.5,-1.75) H4(-1,-1.75) H5(-0.5,-1.75) H6(0,-1.75) H7(0.5,-1.75) H8(1,-1.75) H9(1.5,-1.75) H10(2,-1.75) H11(2.5,-1.75)
  silkscreen extent -3.25,-2.5 3.25,2.5